# Altium PCB Zigbee.PcbDoc
Units mil, origin at the board's own origin, x right, y up, seen from the top; angles counter-clockwise.
Board outline 4210.71 x 3115 mil, 2 copper layers (Top Layer, Bottom Layer); 90 components, 63 nets, 303 pads, 18 vias.
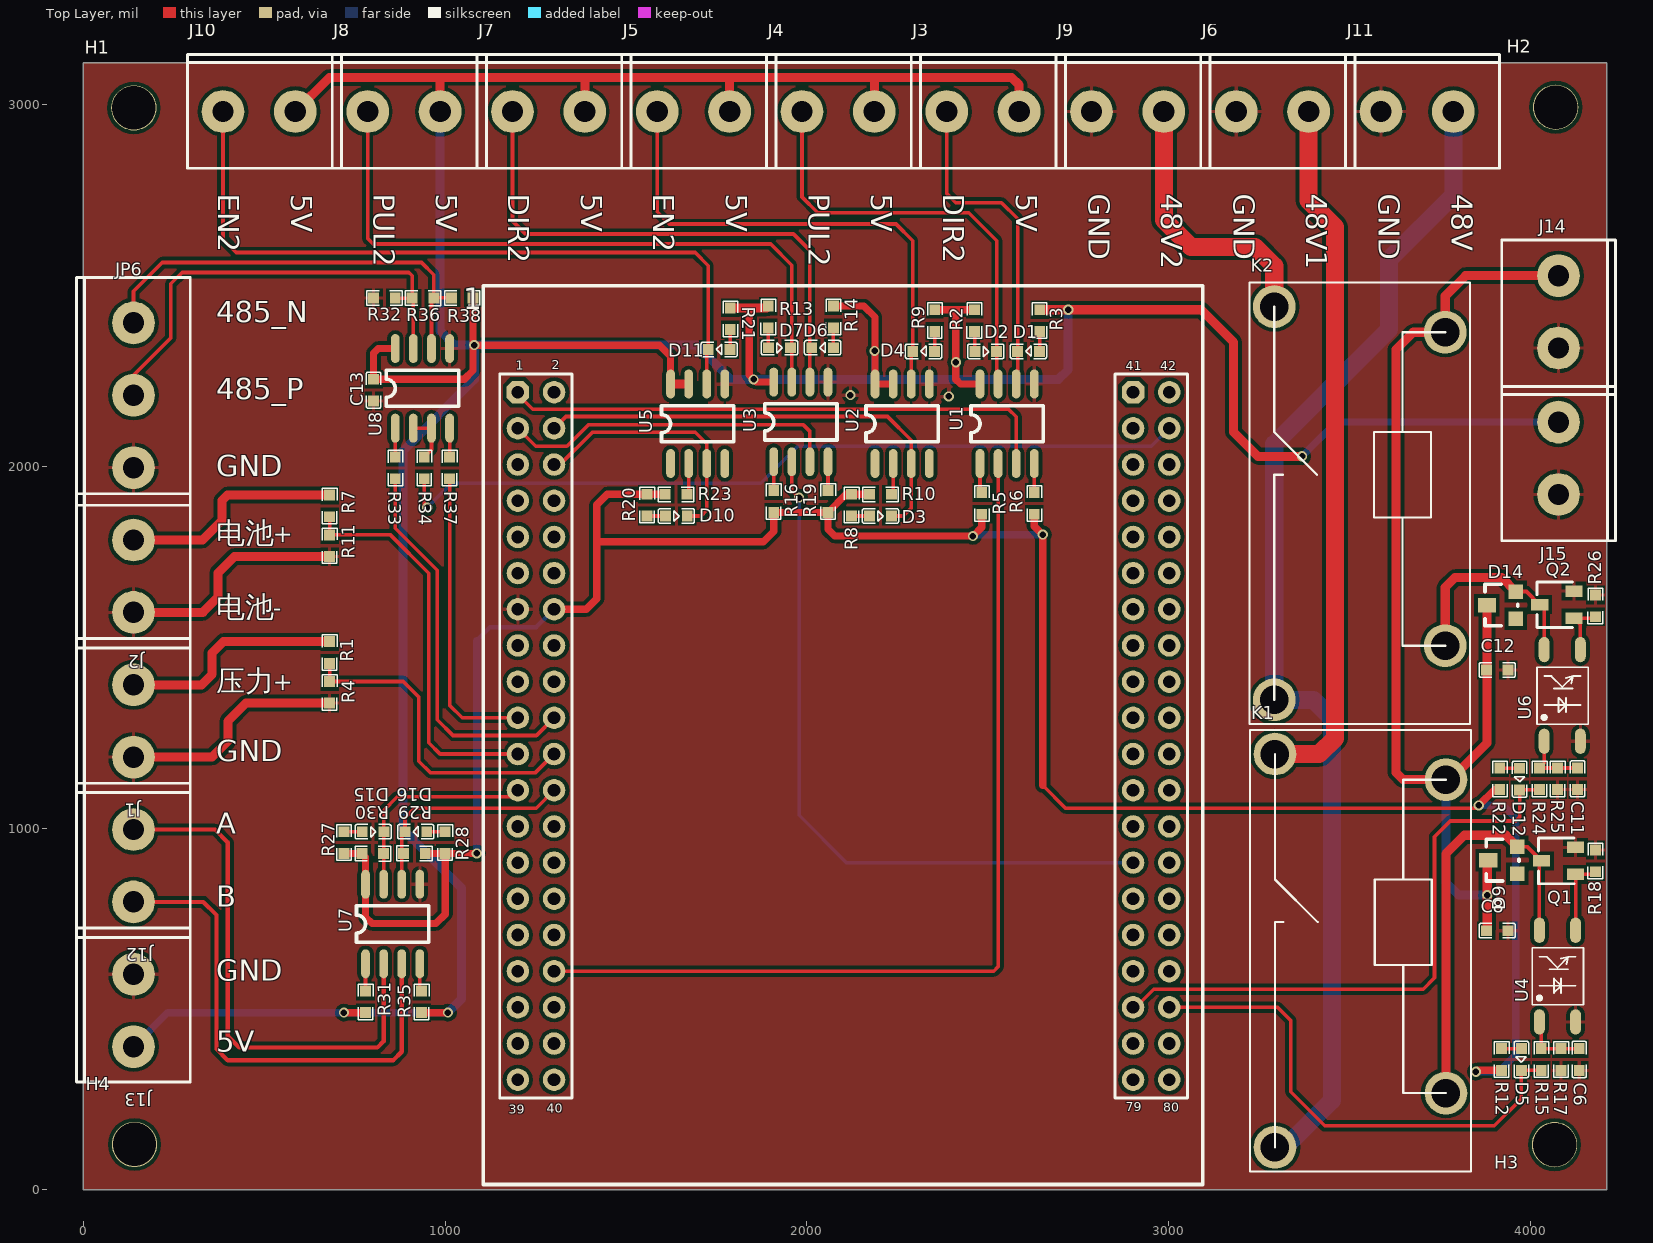
[diagram p0: Top Layer view]
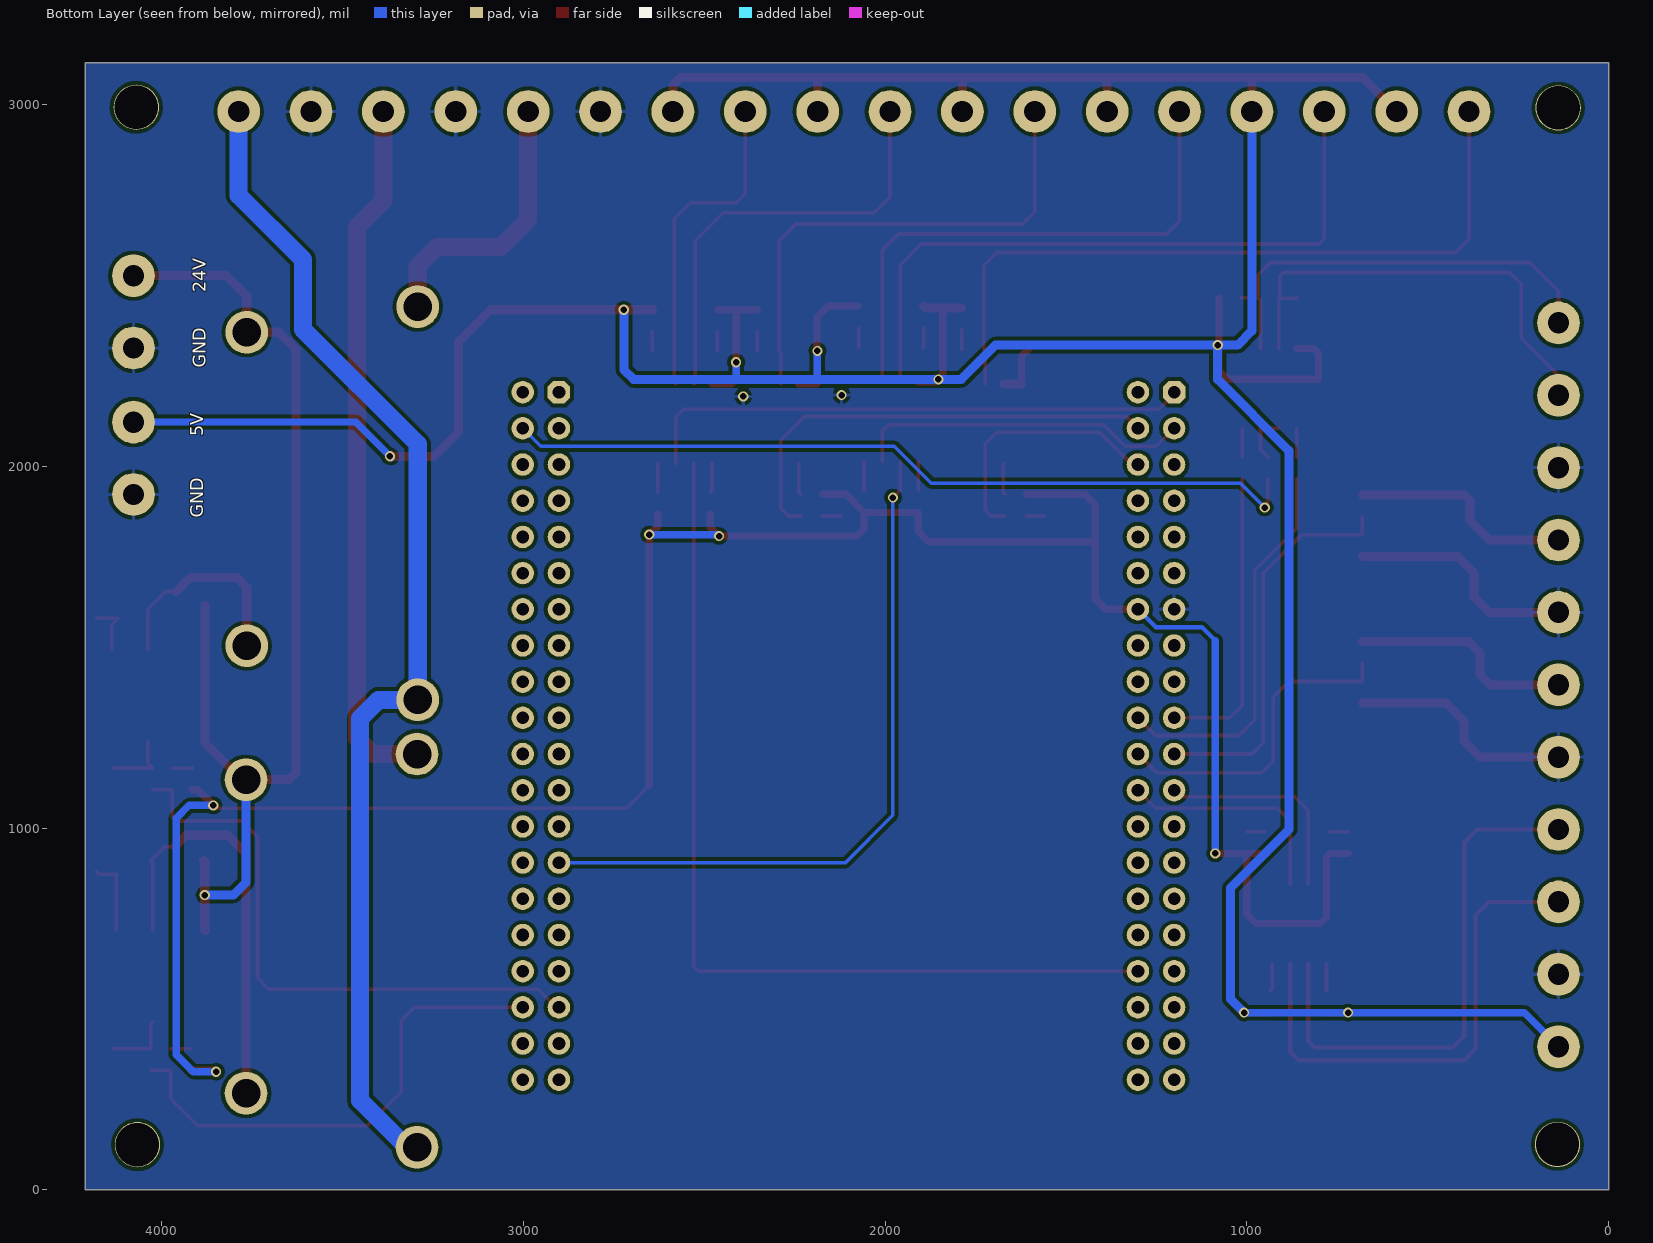
[diagram p1: Bottom Layer view, seen from below]

## Layer stack, top to bottom
Top Solder: solder mask 0.4, Solder Resist, Dk 3.5
Top Layer: signal copper 1.4
Dielectric 1: dielectric 12.6, FR-4, Dk 4.8
Bottom Layer: signal copper 1.4
Bottom Solder: solder mask 0.4, Solder Resist, Dk 3.5

## Board outline
0,0 0,3115 4210.71,3115 4210.71,0

## Design rules (kind name [scope] priority, off if disabled: settings)
Clearance [All] p1: gap=10
ComponentClearance [All] p1 off: gap=10 collisioncheckmode=3 verticalgap=10 showdistances=FALSE
Height [All] p1 off: minheight=0 maxheight=1000 prefheight=500
PolygonConnect [All] p1: connectstyle=Relief reliefconductorwidth=10 reliefentries=4 polygonreliefangle="90 Angle" airgapwidth=10
RoomDefinition Zigbee [InComponentClass('Zigbee')] p1 off: confinementstyle=ConfineIn formatcopy=TRUE lockcomponents=FALSE outline -2995,-1020 -2120,-1020 -2995,-1020
RoutingVias [All] p1: holewidth=28 width=50 viastyle="Through Hole" minholewidth=28 minwidth=50 maxholewidth=28 maxwidth=50
SolderMaskExpansion [All] p1: expansion=4
Width [All] p1: maxlimit=200 minlimit=10 preferedwidth=10 minimp=50.000000 maximp=50.000000 favimp=50.000000
28 further rules are at their usual default settings.

## Components (designator, comment, footprint, x,y, rotation, side; value= is the part's Value field where it differs from the comment)
1 "F407VGT6底座封装" F407VGT6底座封装 1201.26,2204.41 r0 top
C6 "1uF" 0603_C 4134.17,360.39 r270 top
C8 "1uF" 0603_C 3907.56,716.22 r180 top
C11 "1uF" 0603_C 4129.57,1135.98 r270 top
C12 "1uF" 0603_C 3907.56,1436.69 r180 top
C13 "0.1uF" 0603_C 802.48,2210 r90 top
D1 "LED" 0603_LED 2613.23,2317.2 r180 top
D2 "LED" 0603_LED 2493.23,2317.2 r0 top
D3 "LED" 0603_LED 2202.23,1862.2 r0 top
D4 "LED" 0603_LED 2323.23,2317.2 r180 top
D5 "LED红" 0603_LED 3974.17,361.39 r270 top
D6 "LED" 0603_LED 2044.23,2327.2 r180 top
D7 "LED" 0603_LED 1923.23,2327.2 r0 top
D9 "MMBD7000" SOT23 3963.31,868.82 r90 top
D10 "LED" 0603_LED 1638.23,1862.2 r0 top
D11 "LED" 0603_LED 1758.23,2322.2 r180 top
D12 "LED红" 0603_LED 3969.57,1135.98 r270 top
D14 "MMBD7000" SOT23 3959.37,1573.54 r90 top
D15 "LED" 0603_LED 800.28,989.72 r0 top
D16 "LED" 0603_LED 920.28,989.72 r180 top
H1 "holes" 铜柱（小焊盘） 138.24,2994.36 r90 top
H2 "holes" 铜柱（小焊盘） 4067.21,2996.17 r90 top
H3 "holes" 铜柱（小焊盘） 4064.22,129.36 r90 top
H4 "holes" 铜柱（小焊盘） 140,130 r90 top
J1 "COM_2" 5.08A-2PIN 139.06,1195.75 r90 top
J2 "COM_2" 5.08A-2PIN 139.06,1595.75 r90 top
J3 "COM_2" 5.08A-2PIN 2386.3,2980 r0 top
J4 "COM_2" 5.08A-2PIN 1986.3,2980 r0 top
J5 "COM_2" 5.08A-2PIN 1586.3,2980 r0 top
J6 "COM_2" 5.08A-2PIN 3186.3,2980 r0 top
J7 "COM_2" 5.08A-2PIN 1186.3,2980 r0 top
J8 "COM_2" 5.08A-2PIN 786.3,2980 r0 top
J9 "COM_2" 5.08A-2PIN 2786.3,2980 r0 top
J10 "COM_2" 5.08A-2PIN 386.3,2980 r0 top
J11 "COM_2" 5.08A-2PIN 3586.3,2980 r0 top
J12 "COM_2" 5.08A-2PIN 139.06,795.75 r90 top
J13 "COM_2" 5.08A-2PIN 139.06,395.75 r90 top
J14 "COM_2" 5.08A-2PIN 4076.85,2526.46 r270 top
J15 "COM_2" 5.08A-2PIN 4076.85,2121.73 r270 top
JP6 "header" 5.08A-3PIN 139.06,1995.75 r90 top
K1 "OJ-SS-124HM2" G4A-1A-PE-24V 3515.83,692.4 r270 top
K2 "OJ-SS-124HM2" G4A-1A-PE-24V 3513.86,1928.82 r270 top
Q1 "NPN2" SOT-23-3 4034.61,822.24 r90 top
Q2 "NPN2" SOT-23-3 4029.92,1530.28 r90 top
R1 "20K" 0603_R 681.1,1485 r270 top
R2 "2K" 0603_R 2463.23,2402.2 r90 top
R3 "2K" 0603_R 2643.23,2402.2 r90 top
R4 "10K" 0603_R 681.1,1375 r270 top
R5 "180R" 0603_R 2483.23,1897.2 r270 top
R6 "180R" 0603_R 2628.23,1897.2 r270 top
R7 "100K" 0603_R 681.1,1890 r270 top
R8 "1K" 0603_R 2123.23,1892.2 r270 top
R9 "1K" 0603_R 2353.23,2402.2 r270 top
R10 "180R" 0603_R 2203.23,1922.2 r180 top
R11 "5K" 0603_R 681.1,1780 r270 top
R12 "1K" 0603_R 3919.17,360.39 r270 top
R13 "2K" 0603_R 1893.23,2412.2 r90 top
R14 "2K" 0603_R 2073.23,2412.2 r90 top
R15 "470R" 0603_R 4029.17,360.39 r270 top
R16 "180R" 0603_R 1908.23,1902.2 r270 top
R17 "2K" 0603_R 4084.17,360.39 r270 top
R18 "2.2K" 0603_R 4179.21,909.13 r90 top
R19 "180R" 0603_R 2058.23,1902.2 r270 top
R20 "1K" 0603_R 1558.23,1892.2 r270 top
R21 "1K" 0603_R 1788.23,2407.2 r270 top
R22 "1K" 0603_R 3914.57,1135.98 r270 top
R23 "180R" 0603_R 1638.23,1922.2 r180 top
R24 "470R" 0603_R 4024.57,1135.98 r270 top
R25 "2K" 0603_R 4074.57,1135.98 r270 top
R26 "2.2K" 0603_R 4179.21,1613.86 r90 top
R27 "1K" 0603_R 720.28,959.72 r270 top
R28 "1K" 0603_R 1000.28,959.72 r270 top
R29 "4.7K" 0603_R 915.28,929.72 r0 top
R30 "4.7K" 0603_R 800.28,929.72 r180 top
R31 "2K" 0603_R 780.28,519.72 r270 top
R32 "1K" 0603_R 832.48,2465 r180 top
R33 "100R" 0603_R 862.48,1995 r270 top
R34 "100R" 0603_R 942.48,1995 r270 top
R35 "2K" 0603_R 935.28,519.72 r270 top
R36 "120R" 0603_R 939.06,2464.25 r180 top
R37 "100R" 0603_R 1012.48,1995 r270 top
R38 "1K" 0603_R 1047.48,2465 r180 top
U1 "HCPL-2531" SOP8 2477.23,2008.2 r90 top
U2 "6N137" SOP8 2187.23,2008.2 r90 top
U3 "HCPL-2531" SOP8 1907.23,2013.2 r90 top
U4 "TLP185" SOP4 4024.09,464.25 r90 top
U5 "6N137" SOP8 1622.23,2008.2 r90 top
U6 "TLP185" SOP4 4037.28,1239.76 r90 top
U7 "HCPL-2531" SOP8 779.28,625.72 r90 top
U8 "MAX485ESA" SOP8 861.48,2106 r90 top

## Footprints (in the part's own frame and the unit in brackets; to place one, negate y for a bottom-side part, rotate by r counter-clockwise, add the part's x,y. Pads: shape width x height; smd on the part's side, far side on the other; paste and mask are expansions set on the pad)
5.08A-2PIN [mm]
  round 3 hole 1.5: 1(0,0) 2(5.08,0)
  silkscreen extent -2.49,-3.99 8.33,4.01, body extent -2.54,-5.2 8.36,4.6, height 14.2
5.08A-3PIN [mm] "3A"
  round 3 hole 1.5: 1(0,0) 2(5.08,0) 3(10.16,0)
  silkscreen extent -2.64,-3.99 13.36,4.01, body extent -2.53,-5.21 13.45,4.59, height 14.2
0603_C [mil] "Capacitor"
  rect 30x30 smd: 1(-30,0) 2(30,0)
  silkscreen extent -50,-20 50,20, body extent -51,-18 52,21, height 35
0603_LED [mil]
  rect 30x30 smd: 1(-29,0) 2(31,0)
  silkscreen extent -49,-20 51,20, body extent -40,-25 40,25, height 43
0603_R [mil]
  rect 30x30 smd: 1(-30,0) 2(30,0)
  silkscreen extent -49,-20 49,21, body extent -32,-16 31,16, height 18
F407VGT6底座封装 [mil]
  oct 62x62 hole 35: 1(0,0) 41(1700,0)
  round 62 hole 35: 2(100,0) 3(0,-100) 4(100,-100) 5(0,-200) 6(100,-200) 7(0,-300) 8(100,-300) 9(0,-400) 10(100,-400) 11(0,-500) 12(100,-500) 13(0,-600) 14(100,-600) 15(0,-700) 16(100,-700) 17(0,-800) 18(100,-800) 19(0,-900) 20(100,-900) 21(0,-1000) 22(100,-1000) 23(0,-1100) 24(100,-1100) 25(0,-1200) 26(100,-1200) 27(0,-1300) 28(100,-1300) 29(0,-1400) 30(100,-1400) 31(0,-1500) 32(100,-1500) 33(0,-1600) 34(100,-1600) 35(0,-1700) 36(100,-1700) 37(0,-1800) 38(100,-1800) 39(0,-1900) 40(100,-1900) 42(1800,0) 43(1700,-100) 44(1800,-100) 45(1700,-200) 46(1800,-200) 47(1700,-300) 48(1800,-300) 49(1700,-400) 50(1800,-400) 51(1700,-500) 52(1800,-500) 53(1700,-600) 54(1800,-600) 55(1700,-700) 56(1800,-700) 57(1700,-800) 58(1800,-800) 59(1700,-900) 60(1800,-900) 61(1700,-1000) 62(1800,-1000) 63(1700,-1100) 64(1800,-1100) 65(1700,-1200) 66(1800,-1200) 67(1700,-1300) 68(1800,-1300) 69(1700,-1400) 70(1800,-1400) 71(1700,-1500) 72(1800,-1500) 73(1700,-1600) 74(1800,-1600) 75(1700,-1700) 76(1800,-1700) 77(1700,-1800) 78(1800,-1800) 79(1700,-1900) 80(1800,-1900)
  silkscreen extent -95,-2189 1893,294, body extent -50,-1950 1850,50, height 398
G4A-1A-PE-24V [mm]
  round 3 hole 2: 1(10.795,6.35) 2(-11.205,6.35) 3(14.595,-5.65) 4(-13.005,-5.65)
  silkscreen extent -14.71,-7.4 16.29,8.1, body extent -14.72,-7.4 16.29,8.09, height 27
SOP4 [mil] "AQY211G2S"
  oval 70x30 smd: 1(0,0) 2(0,-100) 3(253.23,-100) 4(253.23,0)
  silkscreen extent 47,-122 205,20, body extent -8,-122 268,20, height 79
SOP8 [mil]
  oval 80x24 smd: 1(-1,-1) 2(-1,-51) 3(-1,-101) 4(-1,-151) 5(219,-151) 6(219,-101) 7(219,-51) 8(219,-1)
  silkscreen extent 59,-176 159,24, body extent -9,-174 229,24, height 63
SOT23 [mil]
  rect 40x40 smd: 1(4.88,0.63) 3(79.88,0.63)
  rect 40x50 smd: 2(41.88,80.63)
  silkscreen extent -15,-4 100,86, body extent -15,-11 99,99, height 47
SOT-23-3 [mm]
  rect 0.8x1.2 smd: 1(1.257,-2.273) 2(3.157,-2.273) 3(2.207,0.127)
  silkscreen extent 0.61,-2.17 3.81,0.33, body extent 0.71,-2.42 3.61,0.38
铜柱（小焊盘） [mil]
  round 125 hole 120: 1(-4.36,-1.76)
  body extent -127,-144 118,140, height 161

## Part data
C6 C8 C11 C12 C13: library part CAP, "Capacitor"
D1 D2 D3 D4 D6 D7 D10 D11 D15 D16: "LED 发光二极管"
D5 D12: library part LED, "LED 发光二极管"
H1 H2 H3 H4: library part 铜柱
JP6: library part "HEADER 3"
Q1 Q2: "贴片"
R1 R2 R3 R4 R5 R6 R7 R8 R9 R10 R11 R12 R13 R14 R15 R16 R17 R18 R19 R20 R21 R22 R23 R24 R25 R26 R27 R28 R29 R30 R31 R32 R33 R34 R35 R36 R37 R38: library part RES, "Resistor"
U4 U6: library part TLP184

## Via types
v1: diameter 28, hole 17.99, Top Layer to Bottom Layer, 18 vias

## Nets (pads, with @x,y where several pads share a name; then routed paths per layer and width w, separated by ;. In a path a pad name is that pad's centre, name@x,y a point inside that pad or via, vN(x,y) a via of type N, cw(c..) or ccw(c..) an arc to the next point about the centre after c; other vN are vias at no path point)
0-10V: J1.2 R1.1 | length 626
  Top Layer w25: J1.2 327.24,1395.75 356.38,1424.88 356.38,1483.94 387.44,1515 R1.1
0-48V: J2.2 R7.1 | length 625.8
  Top Layer w25: J2.2 329.61,1795.75 383.94,1850.08 383.94,1905.2 398.74,1920 R7.1
3V3: 1.14 R5.2 R6.2 R8.1 R10.2 R12.2 R16.2 R19.2 R20.1 R22.2 R23.2 R27.2 R28.2 R29.2 R30.2 U7.8 | length 6808.4
  Top Layer w10: 2651.65,1117.8 2714.65,1054.8 3848.5,1054.8 v1(3856.38,1062.68)
  Top Layer w20: R27.2 R30.2 780.28,919.72 U7.8 780.28,754.29 798.66,735.91 974.49,735.91 1000.28,761.69 R28.2 ; R29.2 R28.2 ; v1(1087.76,929.72) R28.2 ; 1.14 1390.24,1604.41 1419.37,1633.54 1419.37,1791.02 ; R23.2 R20.1 1448.19,1922.2 1419.37,1893.39 1419.37,1791.02 ; R10.2 R8.1 2108.23,1922.2 R19.2 ; R5.2 2483.23,1831.26 v1(2458.74,1806.77) 2076.85,1806.77 2058.23,1825.39 R19.2 ; R6.2 2628.23,1834.13 v1(2651.65,1810.71) 2651.65,1117.8 ; v1(3848.5,326.46) 3852.44,330.39 R12.2 ; v1(3856.38,1062.68) 3899.69,1105.98 R22.2 ; 1419.37,1791.02 1880,1791.02 1908.23,1819.25 R16.2 R19.2
  Bottom Layer w12: 1087.76,1518.46 1124.09,1554.8 1251.65,1554.8 1.14
  Bottom Layer w20: v1(1087.76,929.72) 1087.76,1518.46 ; v1(2458.74,1806.77) 2462.68,1810.71 v1(2651.65,1810.71) ; v1(3848.5,326.46) 3911.5,326.46 3958.74,373.7 3958.74,1027.24 3923.31,1062.68 v1(3856.38,1062.68)
5V: C13.2 J3.2 J4.2 J5.2 J7.2 J8.2 J10.2 J13.1 J15.1 R2.2 R3.2 R9.1 R13.2 R14.2 R21.1 R31.2 R35.2 R38.1 U1.8 U2.7 U2.8 U3.8 U5.7 U5.8 U8.8 | length 12462.6
  Top Layer w20: v1(720.67,489.72) R31.2 ; U8.8 815.55,2325 802.48,2311.93 C13.2 1053.39,2240 1077.48,2264.09 v1@1077.48,2334.33 ; R35.2 v1(1007.83,489.72) ; R38.1 v1@1077.48,2334.33 ; U5.8 1623.23,2303.7 1592.6,2334.33 v1(1080.79,2334.33) v1@1077.48,2334.33 ; 1840.63,2437.2 1840.63,2251.65 v1(1852.44,2239.84) 1860.08,2232.2 U3.8 ; R14.2 2157.95,2442.2 2188.23,2411.93 U2.8 U2.7 ; R9.1 2411.5,2432.2 ; R2.2 2411.5,2432.2 ; U1.8 2424.13,2227.2 2411.5,2239.84 v1(2411.5,2287.09) 2411.5,2432.2
  Top Layer w25: J10.2 680.79,3074.49 982.36,3074.49 ; J8.2 986.3,3070.55 982.36,3074.49 ; J7.2 1386.3,3072.13 1383.94,3074.49 ; U5.8 U5.7 ; J5.2 1786.3,3065.83 1777.64,3074.49 ; R21.1 1840.63,2437.2 1888.23,2437.2 R13.2 ; J4.2 2186.3,3067.4 2179.21,3074.49 ; J3.2 2586.3,3053.23 2565.04,3074.49 2179.21,3074.49 ; R3.2 v1(2721.97,2432.2) 3089.21,2432.2 3179.21,2342.2 3179.21,2094.17 3246.14,2027.24 v1(3368.19,2027.24) ; 982.36,3074.49 1383.94,3074.49 ; 1383.94,3074.49 1777.64,3074.49 ; 1777.64,3074.49 2179.21,3074.49
  Bottom Layer w20: J13.1 233.03,489.72 v1(720.67,489.72) v1(1007.83,489.72) ; 2183.15,2239.84 2187.09,2243.78 v1(2187.09,2318.58) ; 2411.5,2239.84 v1(2411.5,2287.09) ; v1@3364.25,2023.31 v1(3368.19,2027.24) 3462.68,2121.73 J15.1
  Bottom Layer w25: J8.2 986.3,2373.7 1025.67,2334.33 v1(1080.79,2334.33) ; v1(1007.83,489.72) 1045.35,527.24 1045.35,834.33 883.94,995.75 883.94,2042.99 1080.79,2239.84 v1(1080.79,2334.33) ; v1(2721.97,2432.2) 2721.97,2266.85 2694.96,2239.84 2411.5,2239.84 2183.15,2239.84 v1(1852.44,2239.84) 1789.45,2239.84 1694.96,2334.33 v1(1080.79,2334.33)
24V: C8.2 C12.2 D9.2 D14.2 J14.1 K1.2 K2.2 | length 3051.7
  Top Layer w25: C8.2 3880,718.66 v1(3880,814.65) 3880,908.02 D9.2 ; D14.2 3878.74,1234.65 3777.64,1133.54 K1.2 3647.72,1133.54 3628.03,1153.23 3628.03,2322.52 3675.47,2369.96 K2.2 3763.86,2470.16 3820.16,2526.46 J14.1
  Bottom Layer w25: K1.2 3765.83,850.08 3801.26,814.65 v1(3880,814.65)
48V: J11.2 K1.3 K2.3 | length 3277.9
  Bottom Layer w50: K1.3 3320.94,117.8 3450.87,247.72 3450.87,1302.83 3399.49,1354.21 K2.3 3291.42,2060.71 3608.35,2377.64 3608.35,2570.55 3786.3,2748.5 J11.2
48V_MOTOR1: J6.2 K1.4 | length 1945.6
  Top Layer w50: K1.4 3415.43,1204.41 3458.74,1247.72 3458.74,2661.1 3386.3,2733.54 J6.2
48V_MOTOR2: J9.2 K2.4 | length 769.3
  Top Layer w50: J9.2 2986.3,2680.79 3061.1,2605.98 3238.27,2605.98 3291.42,2552.83 K2.4
485_DIR: 1.44 R34.2 | length 2224
  Top Layer w10: R34.2 942.48,1893.9 v1(950.87,1885.51)
  Bottom Layer w10: v1(950.87,1885.51) 1017.8,1952.44 1872.13,1952.44 1974.49,2054.8 2951.65,2054.8 1.44
485_N: JP6.3 R36.1 R38.2 U8.6 | length 1219.6
  Top Layer w10: JP6.3 139.06,2483.15 218.58,2562.68 935.12,2562.68 969.06,2528.74 R36.1 ; U8.6 962.48,2457.68 R36.1 ; R38.2 969.8,2465 R36.1
485_P: JP6.2 R32.1 R36.2 U8.7 | length 1283.4
  Top Layer w10: JP6.2 139.06,2250.87 242.2,2354.02 242.2,2503.62 273.7,2535.12 899.68,2535.12 909.06,2525.75 R36.2 ; R32.1 863.23,2464.25 R36.2 ; U8.7 912.48,2460.83 R36.2
485_RXD: 1.19 R37.2 | length 828.7
  Top Layer w10: R37.2 1012.48,1339.65 1047.72,1304.41 1.19
485_TXD: 1.20 R33.2 | length 1075.1
  Top Layer w10: R33.2 862.48,1828.23 978.43,1712.28 978.43,1298.9 1021.73,1255.59 1252.44,1255.59 1.20
DIR_IN_1: 1.1 U1.3 | length 1537.8
  Top Layer w10: 1.1 1201.26,2198.11 1242.2,2157.17 2557.17,2157.17 2578.23,2136.1 U1.3
DIR_IN_2: 1.3 U3.3 | length 943.1
  Top Layer w10: 1.3 1250.87,2054.8 1336.69,2054.8 1395.75,2113.86 1990.24,2113.86 2008.23,2095.87 U3.3
DIR_OUT_1: D1.2 J3.1 U1.6 | length 909.4
  Top Layer w10: J3.1 2386.3,2753.23 2411.5,2728.03 2537.48,2728.03 2582.23,2683.28 D1.2 2582.23,2231.2 U1.6
DIR_OUT_2: D6.2 J7.1 U3.6 | length 1521.8
  Top Layer w10: J7.1 1186.3,2677.64 1222.52,2641.42 1962.68,2641.42 2008.23,2595.87 U3.6
DYLF_102_OUT: 1.22 R1.2 R4.1 | length 899.4
  Top Layer w10: R1.2 R4.1 884.13,1405 927.24,1361.89 927.24,1184.72 958.74,1153.23 1250.08,1153.23 1.22
EN_IN_1: 1.4 D3.2 U2.3 | length 1279.3
  Top Layer w10: 1.4 1334.02,2137.17 2222.83,2137.17 2288.23,2071.77 U2.3 2288.23,1884.29 2266.14,1862.2 D3.2
EN_IN_2: 1.6 D10.2 U5.3 | length 716.5
  Top Layer w10: 1.6 1317.8,2004.41 1407.24,2093.86 1691.34,2093.86 1723.23,2061.97 U5.3 1723.23,1878.35 1707.09,1862.2 D10.2
EN_OUT_1: D4.2 J5.1 U2.6 | length 1413.6
  Top Layer w10: J5.1 1586.3,2702.83 1620.16,2668.98 2246.14,2668.98 2292.23,2622.89 D4.2 2288.23,2313.2 U2.6
EN_OUT_2: D11.2 J10.1 U5.6 | length 2052.5
  Top Layer w10: J10.1 386.3,2627.24 423.31,2590.24 1691.02,2590.24 1727.23,2554.03 D11.2 1723.23,2318.2 U5.6
GND: 1.13 C6.2 C8.1 C11.2 C12.1 C13.1 J1.1 J2.1 J6.1 J9.1 J11.1 J13.2 J14.2 J15.2 JP6.1 Q1.2 Q2.2 R4.2 R11.2 R17.2 R18.2 R25.2 R26.2 R32.2 U1.5 U2.5 U3.5 U4.2 U5.5 U6.2 U7.5 U8.5 | length 1281.3
  Top Layer w25: J1.1 355.59,1195.75 399.68,1239.84 399.68,1294.96 449.72,1345 R4.2 ; J2.1 330.39,1595.75 372.13,1637.48 372.13,1704.41 417.72,1750 R11.2
  other v1: 2391.81,2192.6 2120.16,2196.54
Li_BATTERY_OUT: 1.21 R7.2 R11.1 | length 1095.4
  Top Layer w10: R7.2 R11.1 849.21,1810 954.8,1704.41 954.8,1235.91 986.3,1204.41 1.21
MOTOR1_POWER_CTRL: 1.76 D5.2 R15.2 | length 1388.8
  Top Layer w10: 1.76 3300.47,504.41 3336.69,468.19 3336.69,271.34 3431.18,176.85 3899.69,176.85 3974.17,251.34 D5.2 R15.2
MOTOR2_POWER_CTRL: 1.75 D12.2 R24.2 | length 1642.5
  Top Layer w10: 1.75@2904.8,500.87 2958.74,554.8 3702.83,554.8 3734.33,586.3 3734.33,976.06 3777.64,1019.37 3958.74,1019.37 3969.57,1030.2 D12.2 3970.57,1105.98 R24.2
NetC6_1: C6.1 R15.1 R17.1 U4.1 | length 181
  Top Layer w10: U4.1 4029.17,459.17 R15.1 C6.1
NetC11_1: C11.1 R24.1 R25.1 U6.1 | length 184
  Top Layer w10: U6.1 4037.28,1178.7 R24.1 C11.1
NetD1_1: D1.1 R3.1 | length 55.4
  Top Layer w10: D1.1 2643.23,2318.2 R3.1
NetD2_1: D2.1 R2.1 | length 55.4
  Top Layer w10: R2.1 2463.23,2318.2 D2.1
NetD3_1: D3.1 R8.2 | length 50
  Top Layer w10: R8.2 D3.1
NetD4_1: D4.1 R9.2 | length 55.4
  Top Layer w10: D4.1 2353.23,2318.2 R9.2
NetD5_1: D5.1 R12.1 | length 55
  Top Layer w10: R12.1 D5.1
NetD6_1: D6.1 R14.1 | length 55
  Top Layer w10: D6.1 R14.1
NetD7_1: D7.1 R13.1 | length 55.4
  Top Layer w10: R13.1 1893.23,2328.2 D7.1
NetD9_3: D9.3 K1.1 Q1.3 U4.4 | length 1169.7
  Top Layer w10: D9.3 3990.04,948.7 Q1.3 4024.09,903.62 U4.4
  Top Layer w25: K1.1 3765.83,928.82 3817.01,980 3931.38,980 D9.3
NetD10_1: D10.1 R20.2 | length 51
  Top Layer w10: R20.2 D10.1
NetD11_1: D11.1 R21.2 | length 55.4
  Top Layer w10: D11.1 1788.23,2323.2 R21.2
NetD12_1: D12.1 R22.1 | length 55.4
  Top Layer w10: R22.1 3915.57,1164.98 D12.1
NetD14_3: D14.3 K2.1 Q2.3 U6.4 | length 594.2
  Top Layer w10: D14.3 3988.66,1653.43 Q2.3 4037.28,1604.8 U6.4
  Top Layer w25: K2.1 3763.86,1665.04 3791.42,1692.6 3919.57,1692.6 D14.3
NetD15_1: D15.1 R27.1 | length 51
  Top Layer w10: R27.1 D15.1
NetD16_1: D16.1 R28.1 | length 51
  Top Layer w10: D16.1 R28.1
NetQ1_1: Q1.1 R18.1 U4.3 | length 212.4
  Top Layer w10: U4.3 Q1.1 4171.81,871.73 R18.1
NetQ2_1: Q2.1 R26.1 U6.3 | length 155.7
  Top Layer w10: U6.3 4137.28,1561.89 Q2.1 4175.12,1579.76 R26.1
NetR5_1: R5.1 U1.1 | length 82.1
  Top Layer w10: U1.1 2478.23,1932.2 R5.1
NetR6_1: R6.1 U1.4 | length 80
  Top Layer w10: R6.1 U1.4
NetR10_1: R10.1 U2.2 | length 87.1
  Top Layer w10: R10.1 2238.23,1927.2 U2.2
NetR16_1: R16.1 U3.1 | length 80
  Top Layer w10: R16.1 U3.1
NetR19_1: R19.1 U3.4 | length 80
  Top Layer w10: R19.1 U3.4
NetR23_1: R23.1 U5.2 | length 87.1
  Top Layer w10: R23.1 1673.23,1927.2 U5.2
NetR31_1: R31.1 U7.1 | length 75
  Top Layer w10: R31.1 U7.1
NetR33_1: R33.1 U8.1 | length 80
  Top Layer w10: R33.1 U8.1
NetR34_1: R34.1 U8.2 U8.3 | length 138.3
  Top Layer w10: U8.2 U8.3 962.48,2045 R34.1
NetR35_1: R35.1 U7.4 | length 77.1
  Top Layer w10: U7.4 930.28,554.72 R35.1
NetR37_1: R37.1 U8.4 | length 80
  Top Layer w10: R37.1 U8.4
PUL_IN_1: 1.34 U1.2 | length 2622.7
  Top Layer w10: 1.34 2516.22,604.41 2528.23,616.42 U1.2
PUL_IN_2: 1.67 U3.2 | length 1962.4
  Top Layer w10: U3.2 1958.23,1933.27 v1(1978.43,1913.07)
  Bottom Layer w10: v1(1978.43,1913.07) 1978.43,1035.12 2109.13,904.41 1.67
PUL_OUT_1: D2.2 J4.1 U1.7 | length 1221.7
  Top Layer w10: J4.1 1986.3,2743.78 2029.61,2700.47 2446.93,2700.47 2524.23,2623.17 D2.2 2524.23,2231.2 U1.7
PUL_OUT_2: D7.2 J8.1 U3.7 | length 1876.7
  Top Layer w10: J8.1 786.3,2628.82 801.26,2613.86 1899.68,2613.86 1958.23,2555.31 U3.7
WXY31_A_IN: J12.2 U7.2 | length 1475.6
  Top Layer w12: J12.2 364.25,995.75 399.68,960.32 399.68,424.88 431.18,393.39 813.07,393.39 830.28,410.59 U7.2
WXY31_A_OUT: 1.23 D15.2 R30.1 U7.7 | length 597.9
  Top Layer w10: U7.7 R30.1 830.28,1048.39 868.19,1086.3 1183.15,1086.3 1.23
WXY31_B_IN: J12.1 U7.3 | length 1392.1
  Top Layer w12: J12.1 331.97,795.75 368.19,759.53 368.19,389.45 399.68,357.95 856.38,357.95 880.28,381.85 U7.3
WXY31_B_OUT: 1.24 D16.2 R29.1 U7.6 | length 631
  Top Layer w10: U7.6 880.28,980.72 D16.2 889.28,1028.65 915.43,1054.8 1251.65,1054.8 1.24
pads on no net: 1.2 1.5 1.7 1.8 1.9 1.10 1.11 1.12 1.15 1.16 1.17 1.18 1.25 1.26 1.27 1.28 1.29 1.30 1.31 1.32 1.33 1.35 1.36 1.37 1.38 1.39 1.40 1.41 1.42 1.43 1.45 1.46 1.47 1.48 1.49 1.50 1.51 1.52 1.53 1.54 1.55 1.56 1.57 1.58 1.59 1.60 1.61 1.62 1.63 1.64 1.65 1.66 1.68 1.69 1.70 1.71 1.72 1.73 1.74 1.77 1.78 1.79 1.80 D9.1 D14.1 H1.1 H2.1 H3.1 H4.1 U2.1 U2.4 U5.1 U5.4

## Polygon pours and split planes (outlines as drawn)
GND on Bottom Layer "Bottom Layer-GND 1" (solid, pour order 0): -1.89,3113.86
GND on Bottom Layer "Bottom Layer-GND" (solid, pour order 6): 0,0 4210.71,0 4210.71,3115 0,3115
GND on Top Layer "Top Layer-GND" (solid, pour order 8): 0,3115 0,0 4210.71,0 4210.71,3114.17 0.83,3114.17 0,3115

## Silkscreen, mask and mechanical layers (free items; w line width, h text height)
Top Overlay:
  text "EN2" at 353.98,2753.07 h100 r270
  text "PUL2" at 783.45,2753.07 h100 r270
  text "5V" at 956.29,2753.07 h100 r270
  text "DIR2" at 1155.58,2753.07 h100 r270
  text "5V" at 1357.09,2753.07 h100 r270
  text "EN2" at 1556.38,2753.07 h100 r270
  text "5V" at 1757.89,2753.07 h100 r270
  text "PUL2" at 1985.85,2753.07 h100 r270
  text "5V" at 2158.69,2753.07 h100 r270
  text "DIR2" at 2357.98,2753.07 h100 r270
  text "5V" at 2559.49,2753.07 h100 r270
  text "GND" at 2759.89,2753.07 h100 r270
  text "48V2" at 2960.29,2753.07 h100 r270
  text "GND" at 3160.69,2753.07 h100 r270
  text "48V1" at 3361.09,2753.07 h100 r270
  text "GND" at 3561.49,2753.07 h100 r270
  text "5V" at 555.49,2751.65 h100 r270
  text "48V" at 3761.89,2751.65 h100 r270
  text "485_N" at 368.1,2377.64 h100
  text "485_P" at 368.1,2165.04 h100
  text "GND" at 368.1,1952.44 h100
  text "电池+" at 368.1,1767.4 h100
  text "电池-" at 368.1,1562.68 h100
  text "压力+" at 368.19,1357.95 h100
  text "GND" at 368.1,1165.04 h100
  text "A" at 368.1,964.25 h100
  text "B" at 368.1,763.46 h100
  text "GND" at 368.1,558.74 h100
  text "5V" at 368.1,361.89 h100
Bottom Overlay:
  text "24V" at 3864.25,2480 h60 r270
  text "GND" at 3864.25,2271.34 h60 r270
  text "5V" at 3872.13,2082.36 h60 r270
  text "GND" at 3872.13,1857.95 h60 r270
Mechanical 1:
  the board outline again, w7.87

## Text inside footprints (layer, text, board x,y; h text height)
1: Top Overlay "2" at 1294.96,2268.19 h25; Top Overlay "40" at 1280.79,213.46 h25; Top Overlay "39" at 1175.67,211.1 h25; Top Overlay "41" at 2881.26,2264.41 h25; Top Overlay "42" at 2976.26,2264.41 h25; Top Overlay "80" at 2985.12,216.61 h25; Top Overlay "79" at 2881.18,217.8 h25